# EAGLE board Gas (EAGLE 7.2.0)
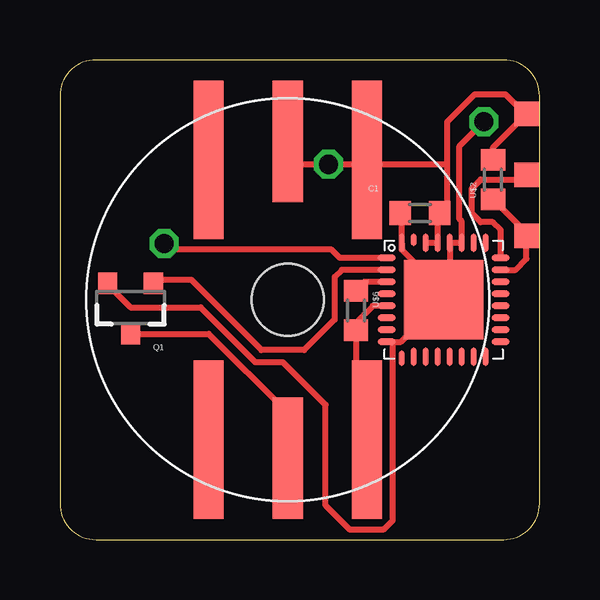
[diagram p0: board, top side]
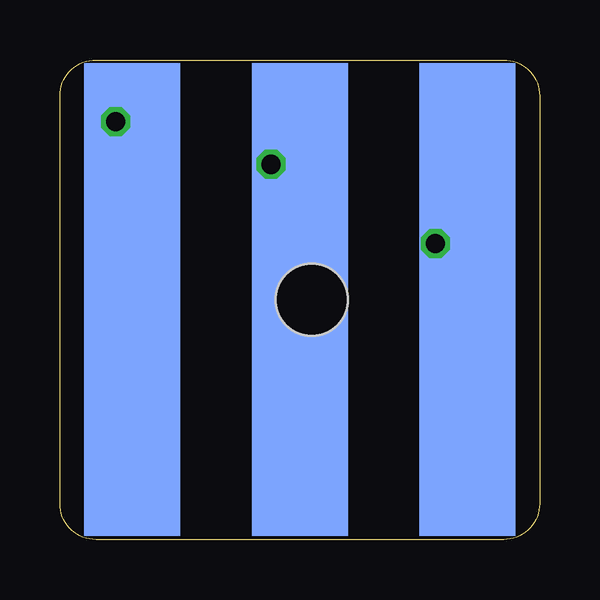
[diagram p1: board, bottom side, seen from below]

Size 20 x 20 mm. Coordinates in mm from the lower left corner, seen from the top.
Copper layers (1*16): Top 0.035mm / dielectric 1.5mm / Bottom 0.035mm
Design rules "Bilex DRU *": minimum track width 10mil, minimum drill 24mil, track to track 10mil, track to pad 10mil, pad to pad 10mil, via to via 10mil, smd to smd 10mil, copper to edge 1mil, drill to drill 8mil, minimum pad ring 10mil, minimum via ring 8mil, stop-mask expansion 4mil, vias tented up to drill 0mil, thermal gap 10mil

## Footprints (pad centres in the part's own frame; a part is rotated, then mirrored left to right if it is on the bottom)
603 = smd 0.889 x 1.016: 1 -0.826,0; 2 0.826,0
SOT23-3 = smd 0.8 x 0.9: 1 -0.95,-1; 2 0.95,-1; 3 0,1.1
CARRIER_SMD2_WIDE_3POL = smd 4 x 19.7 bottom: GND -6.985,3.493; RX/TX 6.985,3.493; VCC 0,3.493 | smd 1.016 x 1.016: RST -9.461,0.826; TST -9.461,-1.714; VCC'' -9.461,-4.255
GASSENSOR = smd 6.604 x 1.27: PA1 -5.842,3.302; PA2 -5.842,-3.302; PB1 5.842,3.302; PB2 5.842,-3.302 | smd 5.08 x 1.27: PHA -6.604,0; PHB 6.604,0 | hole 3: 0,0
QFN32 = smd 0.762 x 0.254: 1 -2.375,1.75; 2 -2.375,1.25; 3 -2.375,0.75; 4 -2.375,0.25; 5 -2.375,-0.25; 6 -2.375,-0.75; 7 -2.375,-1.25; 8 -2.375,-1.75; 17 2.375,-1.75; 18 2.375,-1.25; 19 2.375,-0.75; 20 2.375,-0.25; 21 2.375,0.25; 22 2.375,0.75; 23 2.375,1.25; 24 2.375,1.75 | smd 0.254 x 0.635: 9 -1.75,-2.438 | smd 0.254 x 0.762: 10 -1.25,-2.375; 11 -0.75,-2.375; 12 -0.25,-2.375; 13 0.25,-2.375; 14 0.75,-2.375; 15 1.25,-2.375; 16 1.75,-2.375; 25 1.75,2.375; 26 1.25,2.375; 27 0.75,2.375; 28 0.25,2.375; 29 -0.25,2.375; 30 -0.75,2.375; 32 -1.75,2.375 | smd 0.254 x 0.508: 31 -1.25,2.5 | smd 3.302 x 3.302: TP 0,0

## Placement (x,y rotation side)
C1  100n  [603]  15.01,13.62 180 top
Q1  MOSFET-NCHANNELBSS123LT1G  [SOT23-3]  2.95,9.68 180 top
U$1  CARRIER_SMD2SMD2_3POL_W  [CARRIER_SMD2_WIDE_3POL]  10,13.5 180 top
U$2  10k  [603]  18.06,15.01 90 top
U$3  GASSENSOR  [GASSENSOR]  9.5,10 270 top
U$6  10k  [603]  12.34,9.55 270 top
U$10  MSP430G2553  [QFN32]  16,10 0 top

## Library data of the parts
C1 U$1-U$3 U$6 U$10 = thar
Q1 = SparkFun-DiscreteSemi; PROD_ID: TRANS-08345

## Nets
GND: C1.2 Q1.2 U$1.GND U$10.8 U$10.27 U$10.28 U$10.32 U$10.TP
N$2: Q1.1 U$10.2
N$3: U$1.TST U$10.24
N$4: U$1.RST U$2.1 U$10.23
N$5: Q1.3 U$3.PHB
N$6: U$6.1 U$10.3
N$12: U$1.RX/TX U$10.1
N$14: U$3.PB1 U$6.2 U$10.5
VCC: C1.1 U$1.VCC U$1.VCC'' U$2.2 U$3.PA1 U$3.PHA U$10.29 U$10.30

## Tracks (layer width: path | path; a pad name or v marks a point on that pad's centre or on a via)
GND  (via drill 0.8)
  Top 0.254: 14.15,13.46 C1.2 | U$10.TP 16.25,10.25 U$10.28 U$10.27 16.75,13.27 16.66,13.36 16.66,16.41 v17.68,17.43 | U$10.TP 16.07,9.93 16.79,9.93 15.64,11.08 15.26,11.08 14.25,12.09 U$10.32 14.25,13.55 C1.2 | 13.87,8.25 14.21,8.25 15.39,9.43 15.43,9.43 U$10.TP | C1.2 14.18,13.68 14.12,13.74 14.12,13.87 | Q1.2 2,10.63 2.95,9.68 5.87,9.68 8.15,7.39 9.29,7.39 11.07,5.62 11.07,1.42 12.09,0.41 13.49,0.41 13.87,0.79 13.87,8.25 | U$10.8 13.87,8.25
  Bottom 0.254: 18,13.5 17.93,13.56 v17.68,17.43 18,17.1 U$1.GND
N$2
  Top 0.254: U$10.2 11.75,11.25 11.45,10.95 11.45,9.17 10.18,7.9 8.41,7.9 5.49,10.82 4.02,10.82 Q1.1
N$3
  Top 0.254: U$10.24 18.38,12.92 18.06,13.24 17.55,13.24 17.17,13.62 17.17,14.63 17.55,15.01 19.26,15.01 U$1.TST
N$4
  Top 0.254: U$10.23 18.99,11.25 19.45,11.71 U$1.RST 19.46,12.79 U$2.1
N$5
  Top 0.254: Q1.3 6.2,8.58 9.42,5.36 9.29,3.6 U$3.PHB
N$6
  Top 0.254: U$10.3 12.71,10.75 U$6.1
N$12  (via drill 0.8)
  Top 0.254: U$10.1 11.67,11.75 11.33,12.09 4.6,12.09 v4.34,12.35
  Bottom 0.254: U$1.RX/TX 3.01,11.02 v4.34,12.35
N$14
  Top 0.254: U$10.5 13.05,9.75 12.34,9.04 U$6.2 12.34,4.62 U$3.PB1
VCC  (via drill 0.8)
  Top 0.254: 19.5,17.52 19.46,17.56 | 19.2,17.56 19.2,17.51 | 19.2,17.51 19.46,17.56 | 19.65,17.95 19.65,17.82 | 19.65,17.82 19.65,17.75 19.46,17.56 | 19.65,17.82 19.59,17.75 U$1.VCC'' 18.06,16.35 U$2.2 | 19.2,17.51 19.2,17.69 19.59,18.07 19.08,18.07 18.58,18.57 17.3,18.57 16.15,17.43 16.15,15.65 | C1.1 15.52,13.56 15.97,13.56 16.03,13.62 16.15,13.62 16.15,13.87 | U$10.30 U$10.29 15.75,13.53 C1.1 | C1.1 15.9,13.62 16.15,13.87 | 16.15,13.87 16.15,15.65 | U$3.PHA 9.5,15.82 9.68,15.65 v11.2,15.65 12.98,15.65 | 12.98,15.65 16.15,15.65 | U$3.PA1 12.8,15.82 12.98,15.65
  Bottom 0.254: U$1.VCC 10,14.45 v11.2,15.65